# Altium PCB tiva_shield.PcbDoc
Units mil, origin at the board's own origin, x right, y up, seen from the top; angles counter-clockwise.
Board outline 2500 x 3605.58 mil, 2 copper layers (Top Layer, Bottom Layer); 19 components, 44 nets, 100 pads, 17 vias.
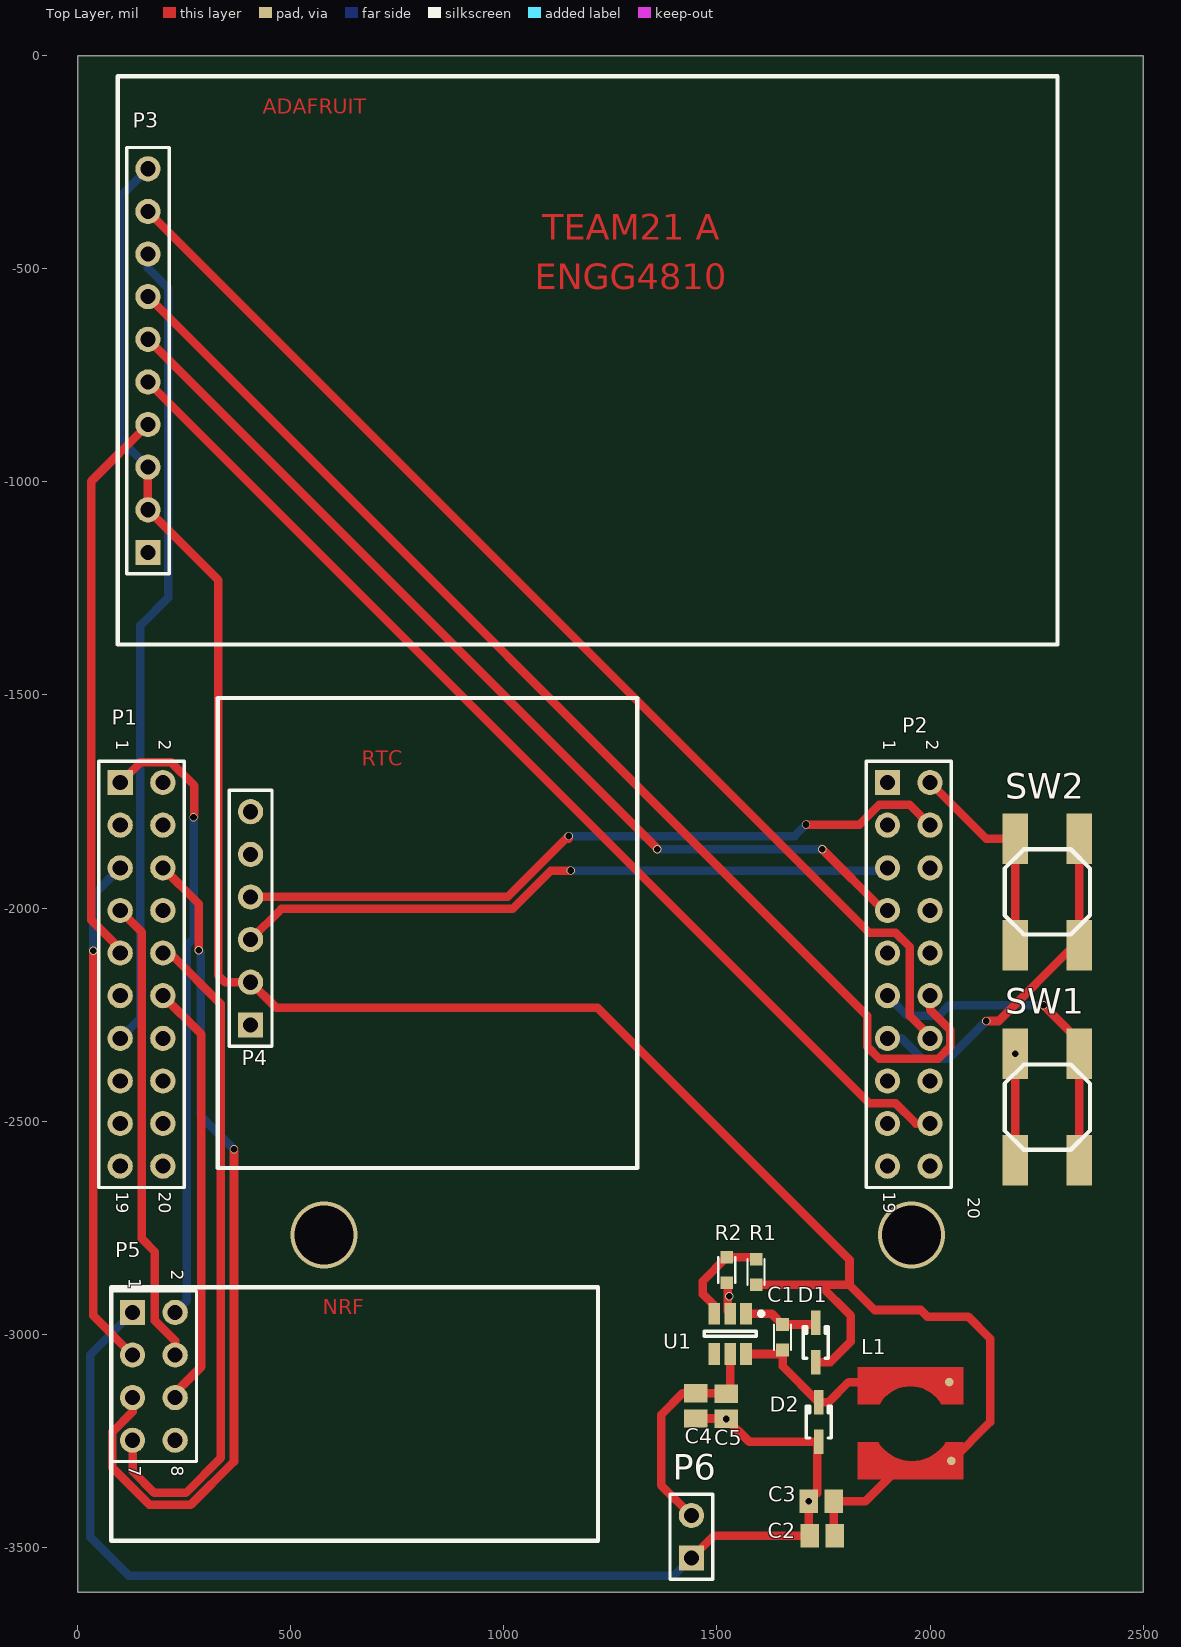
[diagram p0: Top Layer view]
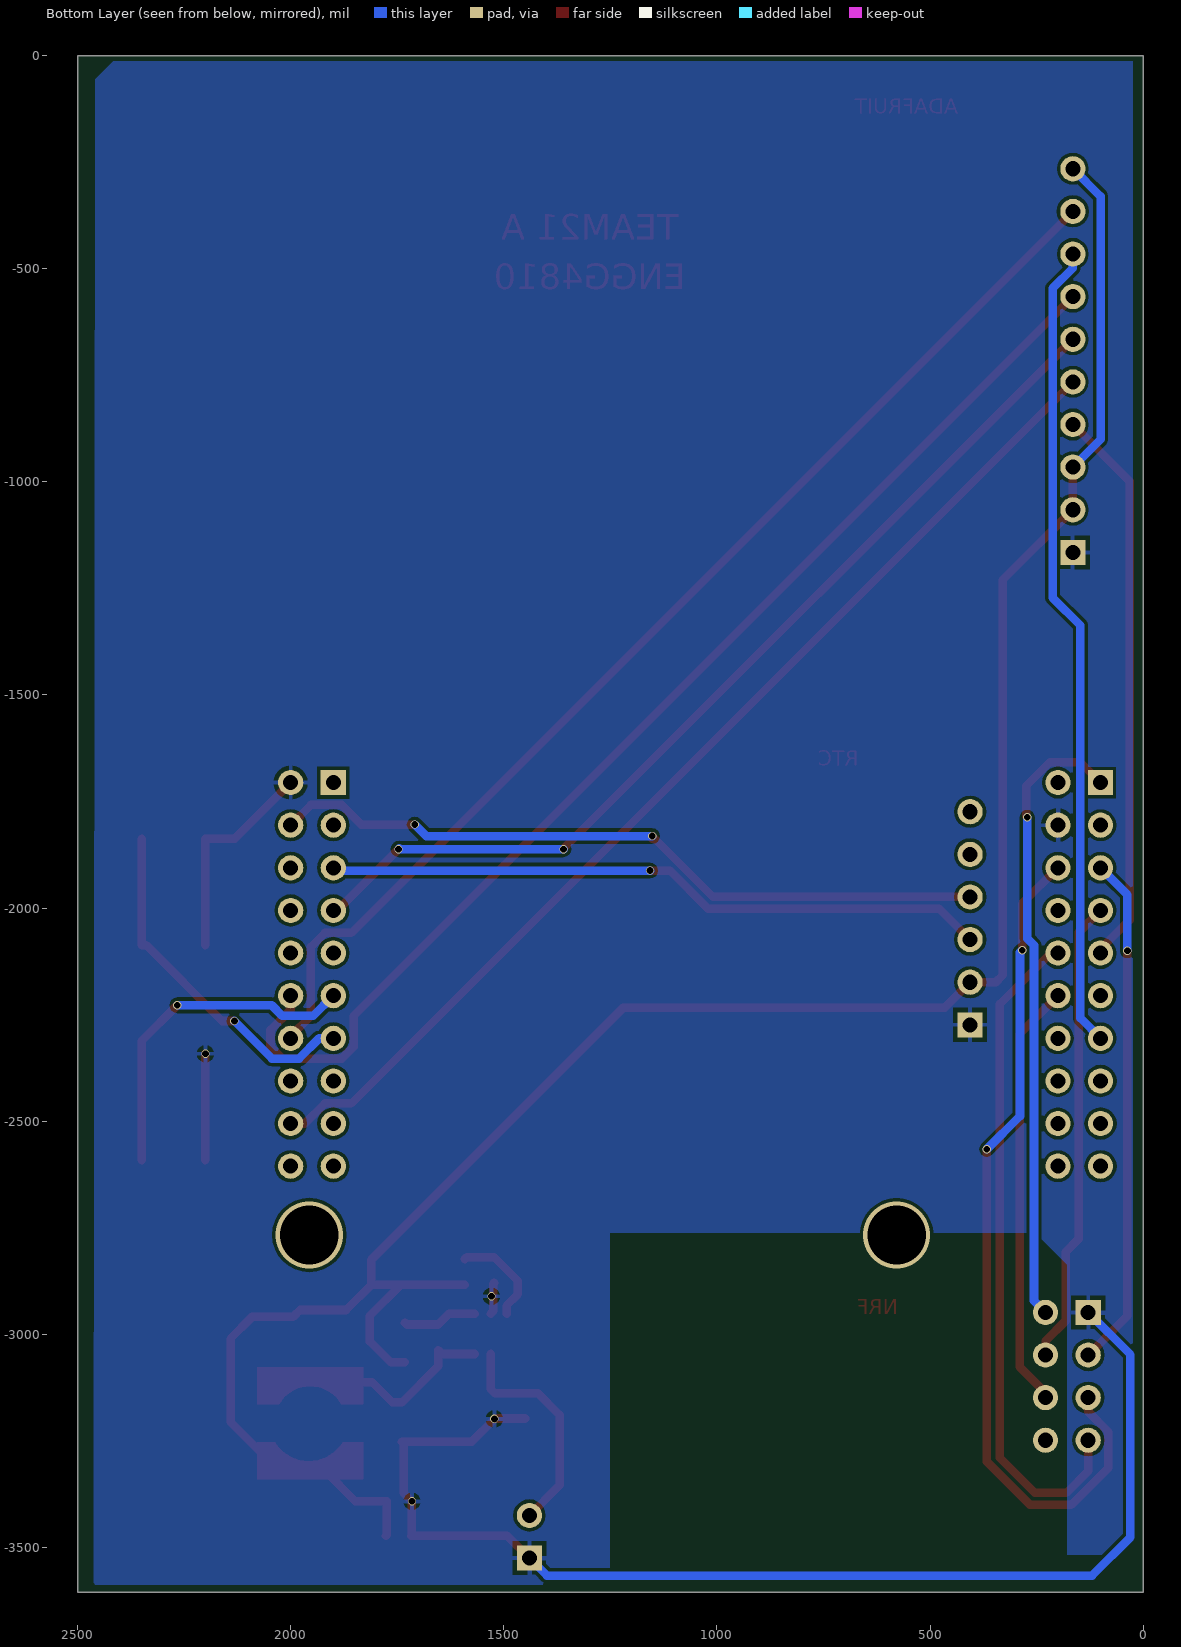
[diagram p1: Bottom Layer view, seen from below]

## Layer stack, top to bottom
Top Layer: signal copper 1.4
Dielectric: dielectric 12.6, FR-4, Dk 4.8
Bottom Layer: signal copper 1.4

## Board outline
0,-3605.58 0,0 2500,0 2500,-3605.58

## Design rules (kind name [scope] priority, off if disabled: settings)
Clearance [All] p1: gap=7.87
PolygonConnect [All] p1: connectstyle=Relief reliefconductorwidth=10 reliefentries=4 polygonreliefangle="90 Angle" airgapwidth=10
RoutingVias [All] p1: holewidth=28 width=50 viastyle="Through Hole" minholewidth=28 minwidth=50 maxholewidth=28 maxwidth=50
SolderMaskExpansion [All] p1: expansion=4
Width [All] p1: maxlimit=20 minlimit=10 preferedwidth=20
28 further rules are at their usual default settings.

## Components (designator, comment, footprint, x,y, rotation, side; value= is the part's Value field where it differs from the comment)
C1 "Cap" 0603E 1654,-2977 r270 top
C2 "Cap" C0805 1747,-3473 r0 top
C3 "Cap" C0805 1745,-3392 r0 top
C4 "Cap" C0805 1450,-3168 r270 top
C5 "Cap" C0805 1522,-3169 r270 top
D1 "1SS404" SOD-323 1732,-3019 r90 top
D2 "1SS404" SOD-323 1739,-3206 r90 top
L1 "Inductor" 5828-INDUCTOR 1830,-3077 r0 top
P1 "TIVA LEFT" HDR2X10 100,-1705.58 r270 top
P2 "TIVA RIGHT" HDR2X10 1900,-1705.58 r270 top
P3 "DISPLAY" HDR1X10 165,-1165.58 r90 top
P4 "RTC" HDR1X6 406,-2274 r90 top
P5 "NRF" HDR2X4 129,-2948.58 r270 top
P6 "Vin" HDR1X2 1440,-3525 r90 top
R1 "Res1" 0603E 1592,-2824 r270 top
R2 "Res1" 0603E 1523,-2879 r90 top
SW1 "SW-SPST" "Switch - SMD" 2375,-2567 r90 top
SW2 "SW-SPST" "Switch - SMD" 2375,-2062 r90 top
U1 "Buck" SOT23-6 1531,-2999 r270 top

## Footprints (in the part's own frame and the unit in brackets; to place one, negate y for a bottom-side part, rotate by r counter-clockwise, add the part's x,y. Pads: shape width x height; smd on the part's side, far side on the other; paste and mask are expansions set on the pad)
0603E [mil]
  rect 30x30 smd: 1(0,0) 2(60,0)
  silkscreen extent 0,-20 60,20
5828-INDUCTOR [mil]
  round 20 smd: 1(215,-35) 2(220,-220)
  Top Layer region: 0,-86.61 0,0 248.03,0 248.03,-86.61 196.61,-86.61 165.86,-56.14 124.02,-44.99 82.17,-56.14 51.42,-86.61 51.42,-86.61
  Top Layer region: 0,-263.23 0,-176.61 48.39,-176.61 82.31,-208.65 127.5,-220.3 172.69,-208.65 206.61,-176.61 206.61,-176.61 248.03,-176.61 248.03,-263.23
C0805 [mm] "Chip Capacitor, Body 2.0x1.3mm, IPC High Density"
  rect 1.1x1.4 smd: 1(-0.75,0) 2(0.75,0)
  body extent -1.1,-0.72 1.1,0.72, height 1.4
HDR1X2 [mm] "Connector; Header; 2 Position"
  rect 1.5x1.5 hole 0.9: 1(0,0)
  round 1.5 hole 0.9: 2(2.54,0)
  silkscreen extent -1.27,-1.27 3.81,1.27
HDR1X6 [mm] "Connector; Header; 6 Position"
  rect 1.5x1.5 hole 0.9: 1(0,0)
  round 1.5 hole 0.9: 2(2.54,0) 3(5.08,0) 4(7.62,0) 5(10.16,0) 6(12.7,0)
  silkscreen extent -1.27,-1.27 13.97,1.27
HDR1X10 [mm] "Connector; Header; 10 Position"
  rect 1.5x1.5 hole 0.9: 1(0,0)
  round 1.5 hole 0.9: 2(2.54,0) 3(5.08,0) 4(7.62,0) 5(10.16,0) 6(12.7,0) 7(15.24,0) 8(17.78,0) 9(20.32,0) 10(22.86,0)
  silkscreen extent -1.27,-1.27 24.13,1.27
HDR2X4 [mm] "Connector; Header; 4x2 Position"
  rect 1.5x1.5 hole 0.9: 1(0,0)
  round 1.5 hole 0.9: 2(0,2.54) 3(2.54,0) 4(2.54,2.54) 5(5.08,0) 6(5.08,2.54) 7(7.62,0) 8(7.62,2.54)
  silkscreen extent -1.27,-1.27 8.89,3.81
HDR2X10 [mm] "Connector; Header; 10x2 Position"
  rect 1.5x1.5 hole 0.9: 1(0,0)
  round 1.5 hole 0.9: 2(0,2.54) 3(2.54,0) 4(2.54,2.54) 5(5.08,0) 6(5.08,2.54) 7(7.62,0) 8(7.62,2.54) 9(10.16,0) 10(10.16,2.54) 11(12.7,0) 12(12.7,2.54) 13(15.24,0) 14(15.24,2.54) 15(17.78,0) 16(17.78,2.54) 17(20.32,0) 18(20.32,2.54) 19(22.86,0) 20(22.86,2.54)
  silkscreen extent -1.27,-1.27 24.13,3.81
SOD-323 [mm] "SOD-323/SC-76; 2 Leads; Body 1.7 x 1.3 mm, (LxW)"
  rect 1.45x0.55 smd: 1(1.175,0) 2(-1.175,0)
  silkscreen extent -0.95,-0.75 0.95,0.75
SOT23-6 [mm]
  rect 1.3x0.7 smd: 1(-1.2,0.95) 2(-1.2,0) 3(-1.2,-0.95) 4(1.2,-0.95) 5(1.2,0) 6(1.2,0.95)
  silkscreen extent -1.32,-1.55 0.15,1.98, body extent -0.9,-1.55 0.9,1.55
"Switch - SMD" [mm]
  rect 3x1.5 smd: 1(-0.635,0.635) 1(5.715,0.635) 2(-0.635,4.445) 2(5.715,4.445)
  silkscreen extent 0,0 5.08,5.08

## Part data
C1 C2 C3 C4 C5: "Capacitor"
D1 D2: library part BA592, "Silicon RF Switching Diode for VHF Band Switching in TV/VTR Tuners"
P1 P2: library part "Header 10X2", "Header, 10-Pin, Dual row"
P3: library part "Header 10", "Header, 10-Pin"
P4: library part "Header 6", "Header, 6-Pin"
P5: library part "Header 4X2", "Header, 4-Pin, Dual row"
P6: library part "Header 2", "Header, 2-Pin"
R1 R2: "Resistor"
U1: library part Component_1

## Via types
v1: diameter 19.68, hole 15.75, Top Layer to Bottom Layer, 15 vias
v2: diameter 157.48, hole 137.8, Top Layer to Bottom Layer, 2 vias

## Nets (pads, with @x,y where several pads share a name; then routed paths per layer and width w, separated by ;. In a path a pad name is that pad's centre, name@x,y a point inside that pad or via, vN(x,y) a via of type N, cw(c..) or ccw(c..) an arc to the next point about the centre after c; other vN are vias at no path point)
+3.3V: P1.1 P5.2 | length 1468
  Top Layer w20: P1.1 147.4,-1658.18 219.63,-1658.18 274,-1712.55 v1@274,-1785
  Bottom Layer w20: P5.2 256.13,-2921.46 256.13,-2087.45 272,-2071.58 v1(272,-1787)
GND: C2.1 C3.1 C4.2 C5.2 D2.2 P1.4 P2.2 P3.1 P4.1 P5.1 P6.1 R2.1 SW1.2 SW2.2 U1.2 | length 3705.2
  Top Layer w20: P6.1 1492,-3473 C2.1 1715.47,-3471 v1(1715.47,-3392) 1735,-3372.47 1735,-3256.26 D2.2 1575.73,-3252.26 v1(1522,-3198.53) 1521,-3197.53 C4.2 ; R2.1 1525.25,-2881.25 1525.25,-2946.01 U1.2 ; P2.2 2131.42,-1837 2200,-1837 SW2.2@2200,-2087 ; SW1.2@2200,-2592 v1(2200,-2342)
  Bottom Layer w20: P5.1 30,-3047.58 30,-3476 120,-3566 1399,-3566 P6.1
  other v1: 1529,-2911
NetC1_1: C1.1 D1.1 U1.1 | length 175.8
  Top Layer w20: U1.1 1628.76,-2951.76 C1.1 1727.74,-2977 D1.1
NetC1_2: C1.2 D2.1 L1.1 U1.6 | length 415.2
  Top Layer w20: U1.6 1644.76,-3046.24 C1.2 1654,-3074.74 D2.1 1761.26,-3159.74 1809,-3112 1880,-3112 1875,-3107
NetR1_1: R1.1 R2.2 U1.3 | length 238
  Top Layer w20: U1.3 1493.6,-2932.6 1467,-2906 1467,-2875 R2.2 1587,-2819 R1.1
PA2: P2.20
PA3: P2.18 P3.5 | length 2555.7
  Top Layer w20: P3.5 1857.6,-2458.18 1919.63,-2458.18 1967.04,-2505.58 P2.18
PA4: P2.16
PA5: P1.15
PA6: P1.17
PA7: P1.19
PB0: P1.5 P5.3 | length 1207.2
  Top Layer w20: v1(37,-2100) 37,-2956.58 P5.3
  Bottom Layer w20: v1(37,-2100) 37,-1968.58 P1.5
PB1: P1.7 P5.4 | length 1096.4
  Top Layer w20: P1.7 151,-2056.58 151,-2776 181.6,-2806.6 181.6,-2968.22 229,-3015.62 P5.4
PB2: P2.4 P4.4 | length 1709
  Top Layer w20: P4.4 1009,-1974 v1(1152,-1831) v1@1152,-1837 ; v1(1709,-1804) 1834.55,-1804 1880.37,-1758.18 1952.6,-1758.18 P2.4
  Bottom Layer w20: v1(1152,-1831) 1682,-1831 v1(1709,-1804)
PB3: P2.5 P4.3 | length 1563.8
  Top Layer w20: P4.3 478.13,-2001.87 1020.55,-2001.87 1110.42,-1912 v1(1157,-1912)
  Bottom Layer w20: v1(1157,-1912) 1893.58,-1912 P2.5
PB4: P1.13 P3.8 | length 1906.2
  Bottom Layer w20: P1.13 147.4,-2258.18 147.4,-1337 212.4,-1272 212.4,-545.95 165,-498.55 P3.8
PB5: P1.3
PB6: P2.14 P3.9 | length 2736.4
  Top Layer w20: P3.9 1857.6,-2058.18 1919.63,-2058.18 1952.6,-2091.15 1952.6,-2252.98 2000,-2300.39 P2.14
PB7: P2.12 P3.7 | length 2815.7
  Top Layer w20: P3.7 1852.6,-2253.18 1852.6,-2325.22 1880.37,-2352.98 2019.63,-2352.98 2047.4,-2325.22 2047.4,-2285.95 2000,-2238.55 P2.12
PC4: P2.7 P3.6 | length 2293.7
  Top Layer w20: P3.6 1360,-1860.58 v1(1360,-1862) ; v1(1747,-1862) 1890.58,-2005.58 P2.7
  Bottom Layer w20: v1(1360,-1862) v1(1747,-1862) v1@1745,-1860
PC5: P2.9
PC6: P2.11 SW1.1 | length 794.8
  Top Layer w20: v1(2266,-2228) 2350,-2312 2350,-2342 SW1.1@2350,-2592
  Bottom Layer w20: P2.11 1947.4,-2252.98 2019.63,-2252.98 2044.62,-2228 v1(2266,-2228)
PC7: P2.13 SW2.1 | length 829.8
  Top Layer w20: v1(2132,-2265) 2161,-2265 2339,-2087 2350,-2087 SW2.1@2350,-1837
  Bottom Layer w20: P2.13 1932.96,-2305.58 1980.37,-2352.98 2044.02,-2352.98 v1(2132,-2265)
PD0: P1.6 P5.5 | length 2009.5
  Top Layer w20: P5.5 129,-3181.55 81.6,-3228.95 81.6,-3313.02 168.45,-3399.87 265.55,-3399.87 367,-3298.42 v1(367,-2566) ; P1.6 284,-1989.58 v1(284,-2099)
  Bottom Layer w20: v1(284,-2099) 289,-2104 289,-2488 v1(367,-2566)
PD1: P1.8
PD2: P1.10 P5.7 | length 1585
  Top Layer w20: P5.7 129,-3321 180,-3372 254,-3372 336,-3290 336,-2225 216.58,-2105.58 P1.10
PD3: P1.12 P5.6 | length 1005.5
  Top Layer w20: P1.12 290,-2295.58 290,-3076 229,-3137 P5.6
PD6: P2.15
PD7: P2.17
PE0: P2.6
PE1: P1.14
PE2: P1.16
PE3: P1.18
PE4: P1.9 P3.4 | length 1323.3
  Top Layer w20: P1.9 100,-2096 32,-2028 32,-998.58 P3.4
PE5: P1.11
PF0: P2.8
PF1: P1.20
PF2: P2.1
PF3: P2.3
PF4: P2.19
RST: P2.10
VBUS: P1.2
VCC: C4.1 C5.1 P6.2 U1.5 | length 534.7
  Top Layer w20: P6.2 1369,-3354 1369,-3189 1419.53,-3138.47 C4.1 1521,-3138.47 1531,-3128.47 U1.5
VREG-5: C2.2 C3.2 D1.2 L1.2 P3.2 P3.3 P3.10 P4.2 R1.2 | length 5280.1
  Top Layer w20: P3.3 P3.2 330,-1230.58 330,-2158 346,-2174 P4.2 466,-2234 1220,-2234 1811,-2825 1811,-2884 ; R1.2 1742,-2884 ; D1.2 1765.74,-3065.26 1814,-3017 1814,-2956 1742,-2884 ; C2.2 1774.53,-3471 C3.2 1848,-3392 1921,-3319 ; L1.2 2141,-3206 2141,-3010 2090,-2959 1994,-2959 1978,-2943 1870,-2943 1811,-2884 ; 1742,-2884 1811,-2884
  Bottom Layer w20: P3.3 100,-900.58 100,-330.58 P3.10
pads on no net: P4.5 P4.6 P5.8 U1.4
copper on no net:
  other v2: 578.4,-2767.06 1956.35,-2767.06

## Polygon pours and split planes (outlines as drawn)
GND on Bottom Layer "Top Layer-No Net" (solid, pour order 8): 2462,-3587 1272,-3587 1264,-3579 1252,-3567 1252,-2762 253,-2762 186,-2829 178,-2837 178,-3517 40,-3517 3,-3480 24,-3459 24,-13 2416,-13 2458,-55

## Other copper
Top Layer:
  text "ADAFRUIT" at 434,-148.58 h60
  text "TEAM21 A" at 1090,-432 h60
  text "ENGG4810" at 1073,-548 h60
  text "RTC" at 667,-1677.58 h60
  text "NRF" at 575,-2964.58 h60

## Silkscreen, mask and mechanical layers (free items; w line width, h text height)
Top Overlay:
  lines w10: 79,-3484.07 79,-2889.58 1220.73,-2889.58 1220.73,-3484.07 79,-3484.07 ; 94,-1381.58 2298.72,-1381.58 2298.72,-48.58 94,-48.58 94,-1381.58 ; 329,-2609.58 329,-1507.22 1313.25,-1507.22 1313.25,-2609.58 329,-2609.58
Mechanical 1:
  the board outline again, w10

## Text inside footprints (layer, text, board x,y; h text height)
P1: Top Overlay "2" at 180,-1605.58 h50 r270; Top Overlay "1" at 80,-1605.58 h50 r270; Top Overlay "19" at 80,-2665.58 h50 r270; Top Overlay "20" at 180,-2665.58 h50 r270
P2: Top Overlay "2" at 1980,-1605.58 h50 r270; Top Overlay "1" at 1880,-1605.58 h50 r270; Top Overlay "19" at 1880,-2665.58 h50 r270; Top Overlay "20" at 2078,-2678 h50 r270
P5: Top Overlay "8" at 209,-3308.58 h50 r270; Top Overlay "7" at 109,-3308.58 h50 r270; Top Overlay "1" at 109,-2868.58 h50 r270; Top Overlay "2" at 209,-2848.58 h50 r270